# Altium PCB 產學1v2.PcbDoc
Units mm, origin at the board's own origin, x right, y up, seen from the top; angles counter-clockwise.
Board outline 142.11 x 95 mm, 2 copper layers (Top Layer, Bottom Layer); 73 components, 69 nets, 348 pads, 69 vias.
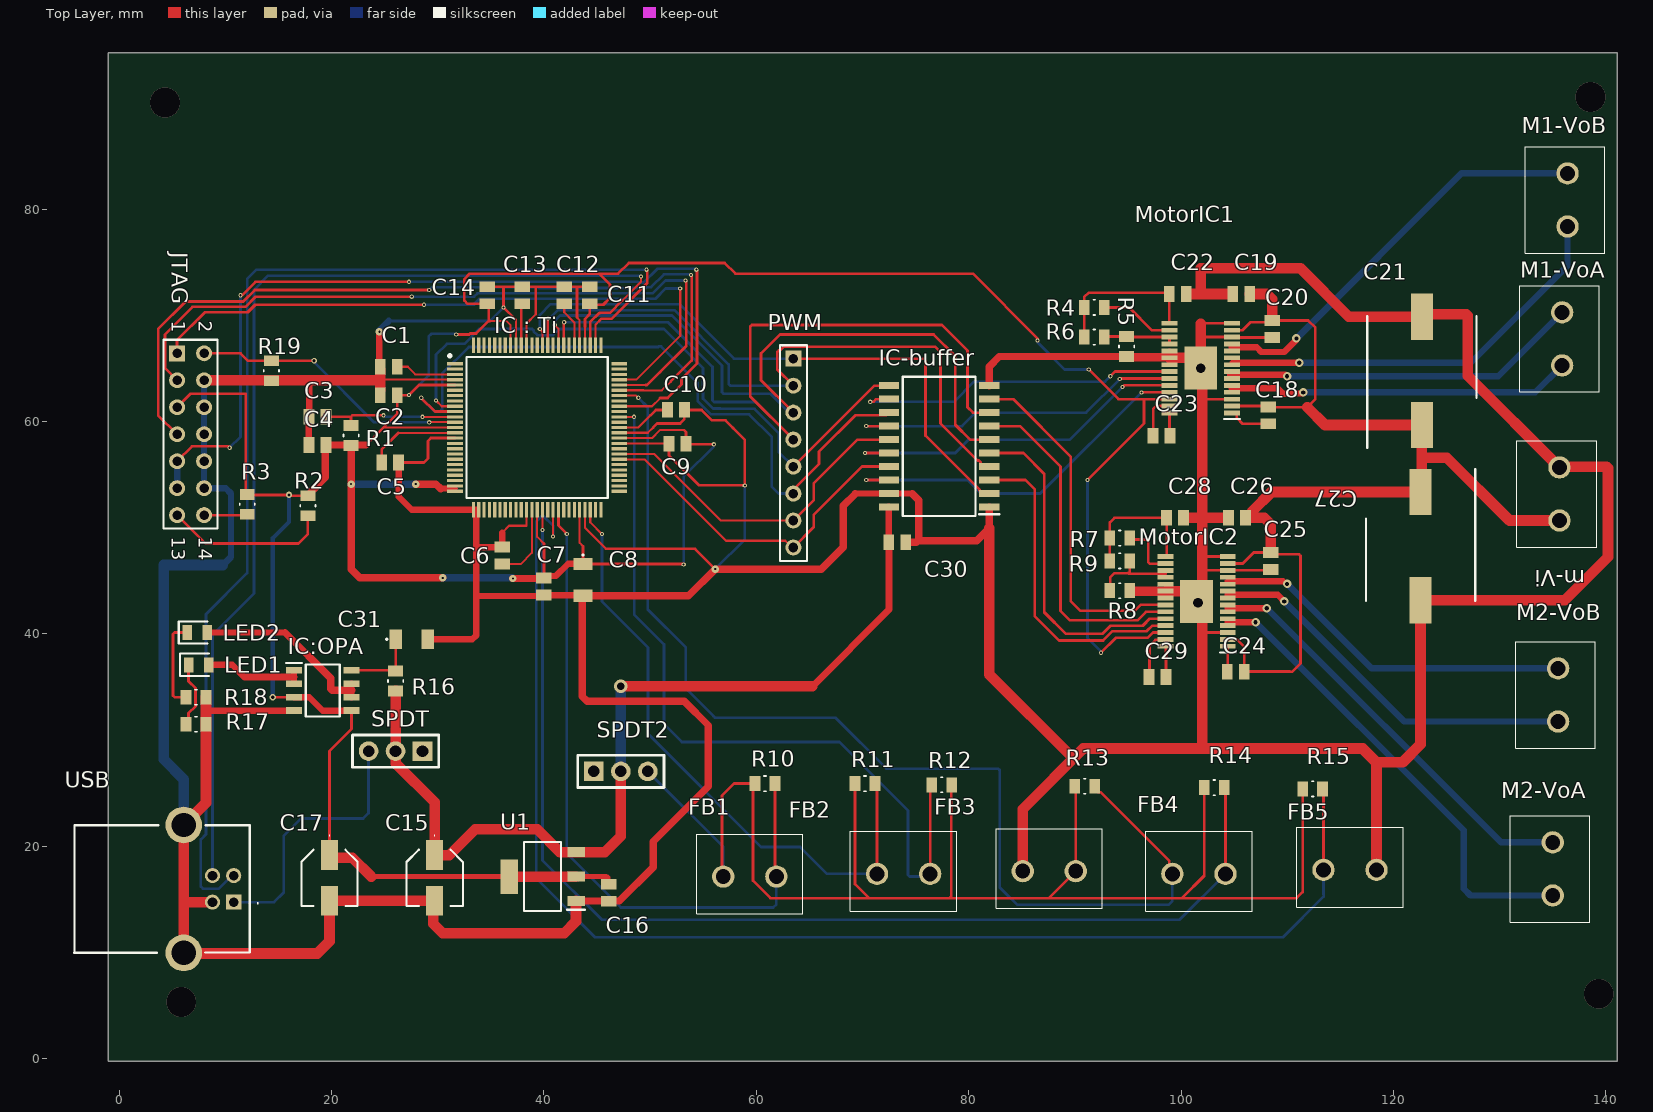
[diagram p0: Top Layer view]
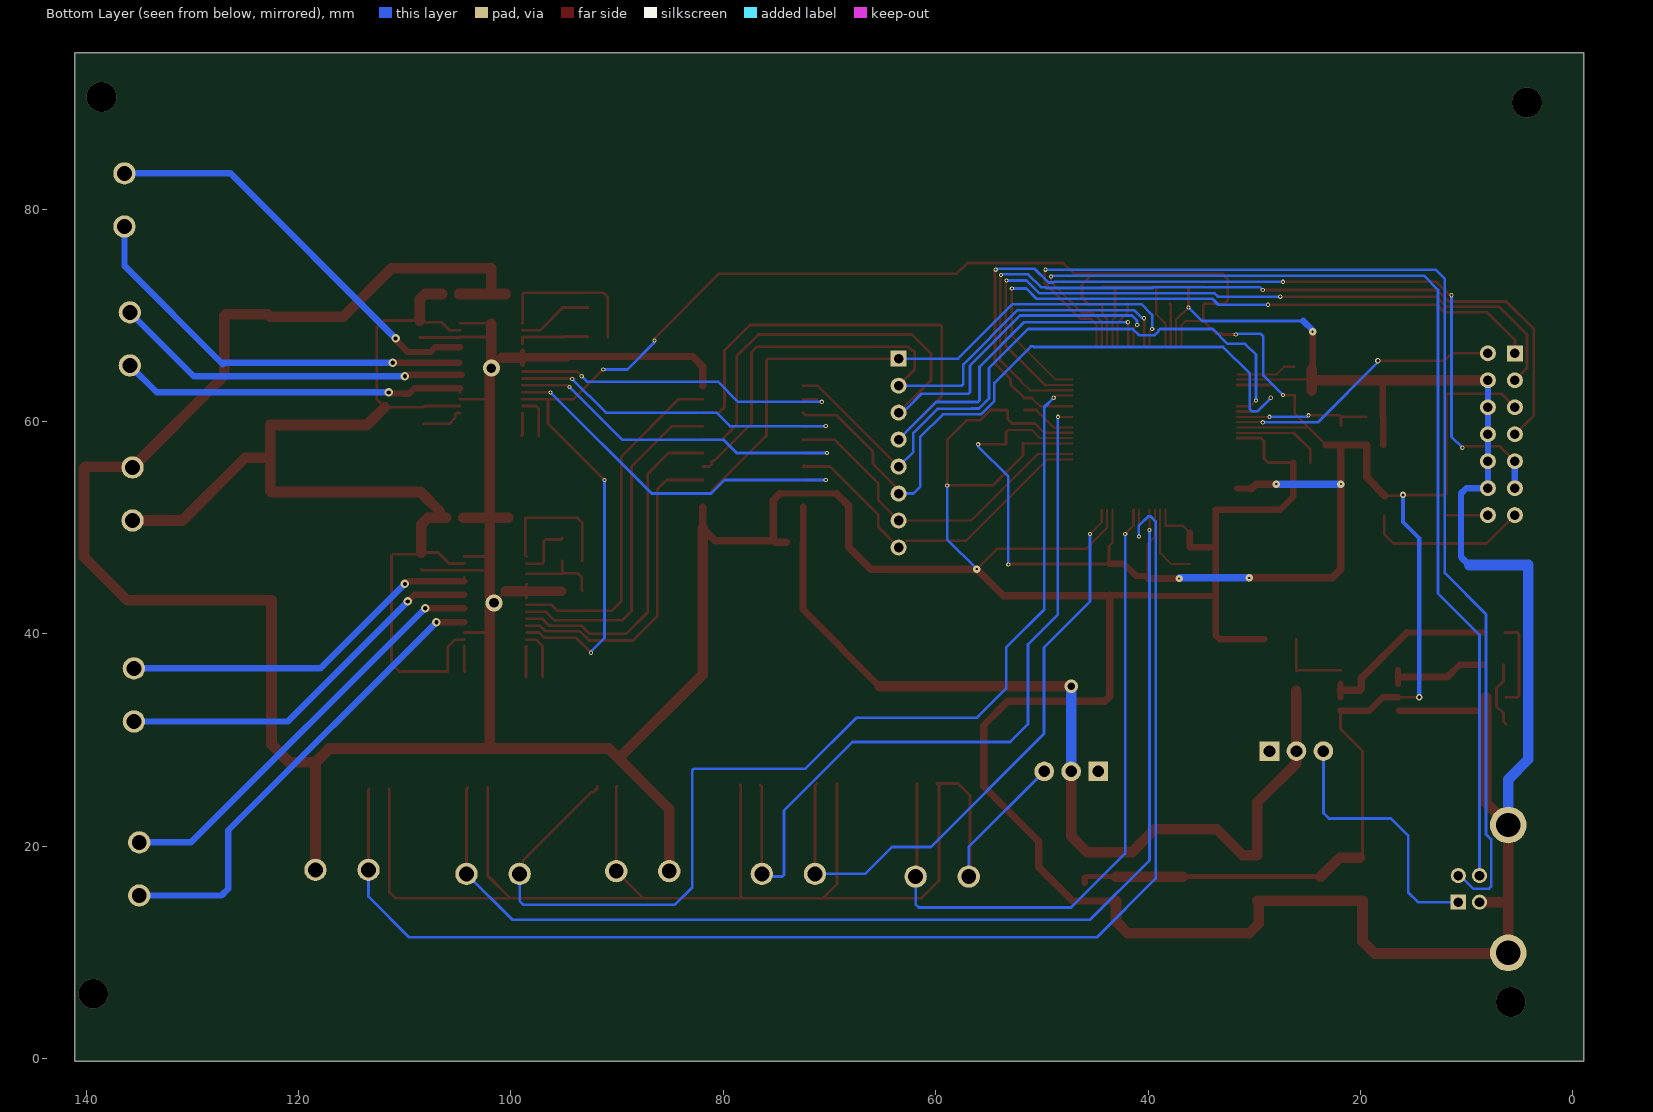
[diagram p1: Bottom Layer view, seen from below]
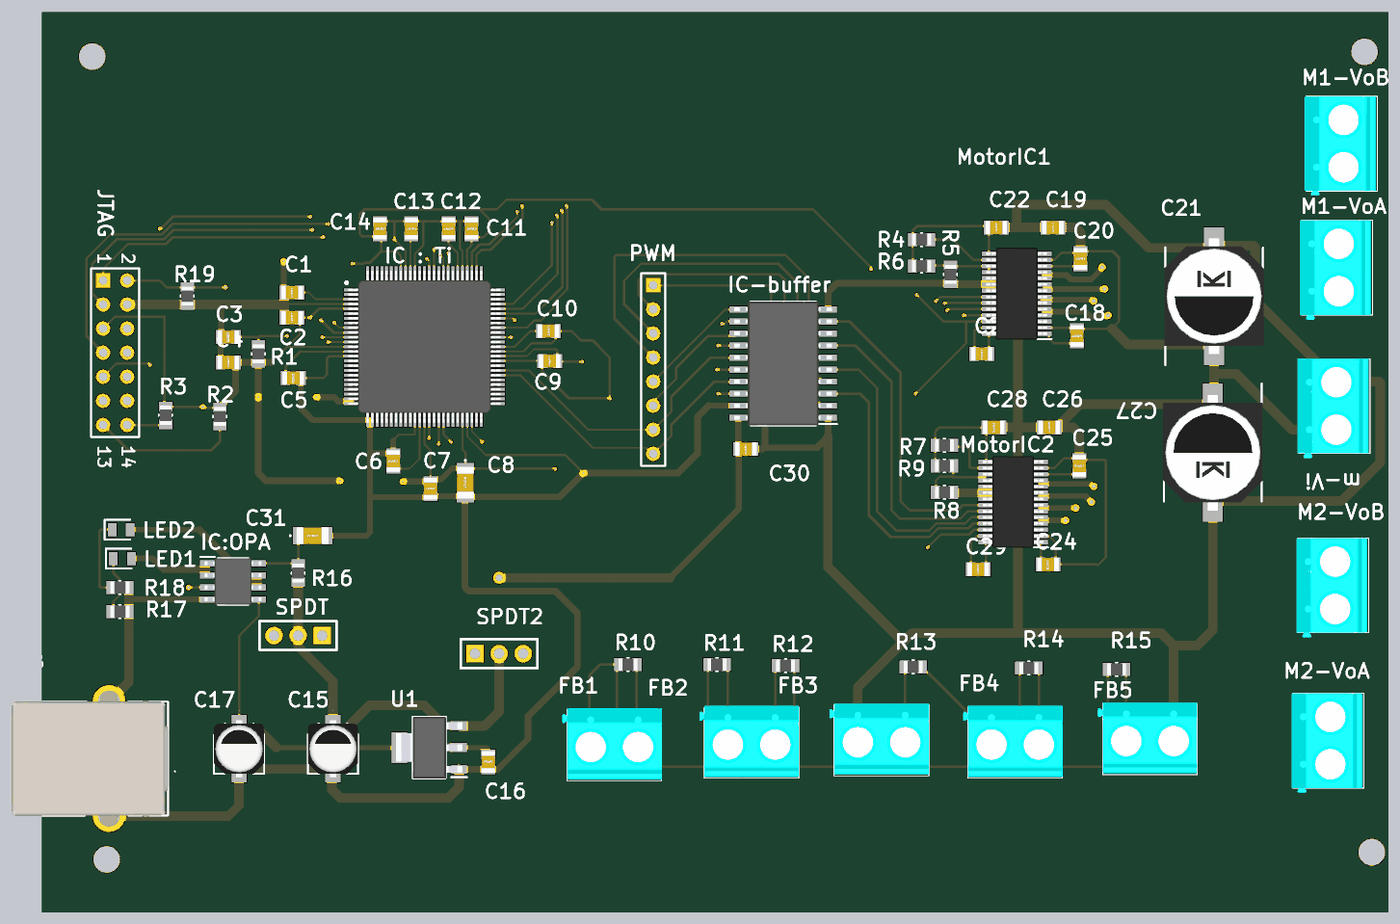
[diagram p2: 3D render of the assembled board from above, using the file's embedded part models]

## Layer stack, top to bottom
Top Solder: solder mask 0.0102, Solder Resist, Dk 3.5
Top Layer: signal copper 0.0356
Dielectric 1: dielectric 0.32, FR-4, Dk 4.8
Bottom Layer: signal copper 0.0356
Bottom Solder: solder mask 0.0102, Solder Resist, Dk 3.5

## Board outline
-1.016,-0.254 -1.016,94.742 141.097,94.742 141.097,-0.254 140.843,-0.254

## Design rules (kind name [scope] priority, off if disabled: settings)
Clearance [All] p1: gap=0.254 ignorepadtopadclearanceinfootprint=FALSE except(0: Arc-Hole Track-Hole SMDPad-Hole THPad-Hole Via-Hole Fill-Hole Poly-Hole Region-Hole Text-Hole)
PolygonConnect [All] p1: connectstyle=Relief reliefconductorwidth=0.254 reliefentries=4 polygonreliefangle="90 Angle" airgapwidth=0.254
RoutingVias [All] p1: holewidth=0.711 width=1.27 viastyle="Through Hole" minholewidth=0.711 minwidth=1.27 maxholewidth=0.711 maxwidth=1.27
SolderMaskExpansion [All] p1: expansion=0.102 istentingtop=FALSE
Width [All] p1: maxlimit=0.254 minlimit=0.254 preferedwidth=0.254
30 further rules are at their usual default settings.

## Components (designator, comment, footprint, x,y, rotation, side; value= is the part's Value field where it differs from the comment)
C1 "1.2uF" CAPC2012X140N 25.4,65.151 r0 top
C2 "2.2uF" CAPC2012X140N 25.4,62.484 r0 top
C3 "0.1uF" CAPC2012X140N 18.669,60.452 r0 top
C4 "2.2uF" CAPC2012X140N 18.669,57.785 r180 top
C5 "1.2uF" CAPC2012X140N 25.527,56.134 r0 top
C6 "1.2uF" CAPC2012X140N 36.068,47.371 r270 top
C7 "2.2uF" CAPC2012X140N 40.005,44.45 r270 top
C8 "1uF" C1206 43.688,45.085 r270 top
C9 "2.2uF" CAPC2012X140N 52.578,57.912 r180 top
C10 "1.2uF" CAPC2012X140N 52.451,61.087 r180 top
C11 "2.2uF" CAPC2012X140N 44.323,71.882 r90 top
C12 "1.2uF" CAPC2012X140N 41.91,71.882 r90 top
C13 "1.2uF" CAPC2012X140N 37.973,71.882 r90 top
C14 "2.2uF" CAPC2012X140N 34.671,71.882 r90 top
C15 "10uF" EEE0GA101SR 29.718,17.018 r270 top
C16 "470PF" CAPC2012X140N 46.101,15.621 r270 top
C17 "10uF" EEE0GA101SR 19.812,17.018 r270 top
C18 "220nF" CAPC2012X140N 108.204,60.579 r90 top
C19 "10nF" CAPC2012X140N 105.664,72.009 r180 top
C20 "10nF" CAPC2012X140N 108.585,68.707 r270 top
C21 "100uF" CAPAE1030X1050N 122.682,64.77 r90 top
C22 "470nF" CAPC2012X140N 99.695,72.009 r0 top
C23 "22nF" CAPC2012X140N 98.171,58.674 r0 top
C24 "220nF" CAPC2012X140N 105.156,36.449 r0 top
C25 "10nF" CAPC2012X140N 108.458,46.863 r270 top
C26 "10nF" CAPC2012X140N 105.283,50.927 r180 top
C27 "100uF" CAPAE1030X1050N 122.555,48.26 r270 top
C28 "470nF" CAPC2012X140N 99.441,50.927 r0 top
C29 "22nF" CAPC2012X140N 97.79,35.941 r0 top
C30 "1.2uf" CAPC2012X140N 73.279,48.641 r0 top
C31 "1uF" C1206 27.559,39.497 r0 top
FB1 "KF301-2P" KF3012P 56.896,17.145 r0 top
FB2 "KF301-2P" KF3012P 71.374,17.399 r0 top
FB3 "KF301-2P" KF3012P 85.09,17.653 r0 top
FB4 "KF301-2P" KF3012P 99.187,17.399 r0 top
FB5 "KF301-2P" KF3012P 113.411,17.78 r0 top
"IC : Ti" "TMS320F28069FPZT" QFP50P1600X1600X160-100N 39.37,59.436 r0 top
IC-buffer "74HC244D" SOIC127P1030X250-20N 77.216,57.658 r180 top
IC:OPA "LM358DR" SOIC127P600X175-8N 19.177,34.671 r0 top
JTAG "Header 7X2" HDR2X7 5.461,66.421 r270 top
LED1 "150080AS75000" LEDC2012X80N 7.493,37.084 r0 top
LED2 "150080AS75000" LEDC2012X80N 7.366,40.132 r0 top
M1-VoA "KF301-2P" KF3012P 135.89,65.278 r90 top
M1-VoB "KF301-2P" KF3012P 136.398,78.359 r90 top
M2-VoA "KF301-2P" KF3012P 135.001,15.367 r90 top
M2-VoB "KF301-2P" KF3012P 135.509,31.75 r90 top
m-Vi "KF301-2P" KF3012P 135.636,50.673 r90 top
MotorIC1 "DRV8424PPWPR" SOP65P640X120-29N 101.854,65.024 r180 top
MotorIC2 "DRV8424PPWPR" SOP65P640X120-29N 101.473,43.053 r180 top
PWM "Header 8" HDR1X8 63.5,65.913 r270 top
R1 "1K" RESC2013X65N 21.844,58.674 r270 top
R2 "4.7K" RESC2013X65N 17.78,52.07 r270 top
R3 "4.7K" RESC2013X65N 12.065,52.197 r270 top
R4 "4.7K" RESC2013X65N 91.821,70.739 r180 top
R5 "5K" RESC2013X65N 94.869,67.056 r90 top
R6 "5K" RESC2013X65N 91.821,67.945 r180 top
R7 "4.7K" RESC2013X65N 94.234,49.022 r180 top
R8 "5K" RESC2013X65N 94.234,44.069 r180 top
R9 "5K" RESC2013X65N 94.234,46.863 r180 top
R10 "2.7K" RESC2013X65N 60.833,25.908 r0 top
R11 "2.7K" RESC2013X65N 70.231,25.908 r0 top
R12 "2.7K" RESC2013X65N 77.47,25.781 r180 top
R13 "2.7K" RESC2013X65N 90.932,25.654 r0 top
R14 "2.7K" RESC2013X65N 103.124,25.527 r0 top
R15 "2.7K" RESC2013X65N 112.395,25.4 r0 top
R16 "1.5K" RESC2013X65N 26.035,35.56 r90 top
R17 "1.5K" RESC2013X65N 7.239,31.496 r0 top
R18 "1.5K" RESC2013X65N 7.239,34.036 r0 top
R19 "4.7K" RESC2013X65N 14.351,64.77 r90 top
SPDT "SW1" PCBComponent_1 28.575,28.956 r90 top
SPDT2 "SW2" PCBComponent_1 44.704,27.051 r270 top
U1 "LD1117AS33TR" SOT230P700X190-4N 39.878,17.145 r180 top
USB "61400416121" 61400416121 10.795,14.732 r270 top

## Footprints (in the part's own frame and the unit in brackets; to place one, negate y for a bottom-side part, rotate by r counter-clockwise, add the part's x,y. Pads: shape width x height; smd on the part's side, far side on the other; paste and mask are expansions set on the pad)
61400416121 [mm]
  rect 1.42x1.42 hole 0.92: 1(0,0)
  round 1.42 hole 0.92: 2(-2.5,0) 3(-2.5,-2) 4(0,-2)
  round 3.45 hole 2.3: MH1(4.77,-4.71) MH2(-7.27,-4.71)
  silkscreen extent -7.25,-14.99 4.75,2.3, body extent -8.72,-14.99 6.22,1.51, height 10.65
C1206 [mm]
  rect 1.15x1.8 smd: 1(-1.5,0) 2(1.5,0)
  silkscreen extent -2.4,-0.05 -2.3,0.05, body extent -1.7,-0.9 1.7,0.9, height 1.75
CAPAE1030X1050N [mm]
  rect 4.35x2.1 smd: 1(-5.1,0) 2(5.1,0)
  silkscreen extent -7.27,-5.15 5.15,5.15, body extent -6.1,-5.25 6.1,5.25, height 10.51
CAPC2012X140N [mm]
  rect 1.02x1.47 smd: 1(-0.8,0) 2(0.8,0)
  body extent -1.15,-0.73 1.15,0.72, height 1.4
EEE0GA101SR [mm]
  rect 2.8x1.6 smd: 1(-2.15,0) 2(2.15,0)
  silkscreen extent -4.03,-2.65 2.65,2.65, body extent 0,0 0,0
HDR1X8 [mm] "Connector; Header; 8 Position"
  rect 1.5x1.5 hole 0.9: 1(0,0)
  round 1.5 hole 0.9: 2(2.54,0) 3(5.08,0) 4(7.62,0) 5(10.16,0) 6(12.7,0) 7(15.24,0) 8(17.78,0)
  silkscreen extent -1.27,-1.27 19.05,1.27
HDR2X7 [mm] "Connector; Header; 7x2 Position"
  rect 1.5x1.5 hole 0.9: 1(0,0)
  round 1.5 hole 0.9: 2(0,2.54) 3(2.54,0) 4(2.54,2.54) 5(5.08,0) 6(5.08,2.54) 7(7.62,0) 8(7.62,2.54) 9(10.16,0) 10(10.16,2.54) 11(12.7,0) 12(12.7,2.54) 13(15.24,0) 14(15.24,2.54)
  silkscreen extent -1.27,-1.27 16.51,3.81
KF3012P [mm]
  round 2.1 hole 1.4: 1(0,0) 2(5,0)
  silkscreen extent -2.5,-3.5 7.5,4, body extent -2.99,-3.35 7.51,4.15, height 10
LEDC2012X80N [mm]
  rect 0.9x1.4 smd: 1(-0.95,0) 2(0.95,0)
  silkscreen extent -1.75,-1.05 0.95,1.05
PCBComponent_1 [mm]
  rect 1.85x1.85 hole 1.1: 1(0,0)
  round 1.85 hole 1.1: 2(0,2.54) 3(0,5.08)
  silkscreen extent -1.52,-1.52 1.52,6.6
QFP50P1600X1600X160-100N [mm]
  rect 1.475x0.3 smd: 1(-7.738,6) 2(-7.738,5.5) 3(-7.738,5) 4(-7.738,4.5) 5(-7.738,4) 6(-7.738,3.5) 7(-7.738,3) 8(-7.738,2.5) 9(-7.738,2) 10(-7.738,1.5) 11(-7.738,1) 12(-7.738,0.5) 13(-7.738,0) 14(-7.738,-0.5) 15(-7.738,-1) 16(-7.738,-1.5) 17(-7.738,-2) 18(-7.738,-2.5) 19(-7.738,-3) 20(-7.738,-3.5) 21(-7.738,-4) 22(-7.738,-4.5) 23(-7.738,-5) 24(-7.738,-5.5) 25(-7.738,-6) 51(7.738,-6) 52(7.738,-5.5) 53(7.738,-5) 54(7.738,-4.5) 55(7.738,-4) 56(7.738,-3.5) 57(7.738,-3) 58(7.738,-2.5) 59(7.738,-2) 60(7.738,-1.5) 61(7.738,-1) 62(7.738,-0.5) 63(7.738,0) 64(7.738,0.5) 65(7.738,1) 66(7.738,1.5) 67(7.738,2) 68(7.738,2.5) 69(7.738,3) 70(7.738,3.5) 71(7.738,4) 72(7.738,4.5) 73(7.738,5) 74(7.738,5.5) 75(7.738,6)
  rect 0.3x1.475 smd: 26(-6,-7.738) 27(-5.5,-7.738) 28(-5,-7.738) 29(-4.5,-7.738) 30(-4,-7.738) 31(-3.5,-7.738) 32(-3,-7.738) 33(-2.5,-7.738) 34(-2,-7.738) 35(-1.5,-7.738) 36(-1,-7.738) 37(-0.5,-7.738) 38(0,-7.738) 39(0.5,-7.738) 40(1,-7.738) 41(1.5,-7.738) 42(2,-7.738) 43(2.5,-7.738) 44(3,-7.738) 45(3.5,-7.738) 46(4,-7.738) 47(4.5,-7.738) 48(5,-7.738) 49(5.5,-7.738) 50(6,-7.738) 76(6,7.738) 77(5.5,7.738) 78(5,7.738) 79(4.5,7.738) 80(4,7.738) 81(3.5,7.738) 82(3,7.738) 83(2.5,7.738) 84(2,7.738) 85(1.5,7.738) 86(1,7.738) 87(0.5,7.738) 88(0,7.738) 89(-0.5,7.738) 90(-1,7.738) 91(-1.5,7.738) 92(-2,7.738) 93(-2.5,7.738) 94(-3,7.738) 95(-3.5,7.738) 96(-4,7.738) 97(-4.5,7.738) 98(-5,7.738) 99(-5.5,7.738) 100(-6,7.738)
  silkscreen extent -8.35,-6.65 6.65,6.87, body extent -8.01,-8.01 8.01,8.01, height 1.5
RESC2013X65N [mil]
  rect 40x55 smd: 1(-37,0) 2(37,0)
  silkscreen extent -4,-28 4,28, body extent -39,-25 39,24, height 24
SOIC127P600X175-8N [mm]
  rect 1.525x0.65 smd: 1(-2.712,1.905) 2(-2.712,0.635) 3(-2.712,-0.635) 4(-2.712,-1.905) 5(2.712,-1.905) 6(2.712,-0.635) 7(2.712,0.635) 8(2.712,1.905)
  silkscreen extent -3.47,-2.45 1.6,2.58, body extent -3,-2.45 3,2.45, height 1.75
SOIC127P1030X250-20N [mm]
  rect 1.9x0.65 smd: 1(-4.725,5.715) 2(-4.725,4.445) 3(-4.725,3.175) 4(-4.725,1.905) 5(-4.725,0.635) 6(-4.725,-0.635) 7(-4.725,-1.905) 8(-4.725,-3.175) 9(-4.725,-4.445) 10(-4.725,-5.715) 11(4.725,-5.715) 12(4.725,-4.445) 13(4.725,-3.175) 14(4.725,-1.905) 15(4.725,-0.635) 16(4.725,0.635) 17(4.725,1.905) 18(4.725,3.175) 19(4.725,4.445) 20(4.725,5.715)
  silkscreen extent -5.68,-6.55 3.42,6.55, body extent -5.15,-6.55 5.15,6.55, height 2.5
SOP65P640X120-29N [mm]
  rect 1.475x0.45 smd: 1(-2.938,4.225) 2(-2.938,3.575) 3(-2.938,2.925) 4(-2.938,2.275) 5(-2.938,1.625) 6(-2.938,0.975) 7(-2.938,0.325) 8(-2.938,-0.325) 9(-2.938,-0.975) 10(-2.938,-1.625) 11(-2.938,-2.275) 12(-2.938,-2.925) 13(-2.938,-3.575) 14(-2.938,-4.225) 15(2.938,-4.225) 16(2.938,-3.575) 17(2.938,-2.925) 18(2.938,-2.275) 19(2.938,-1.625) 20(2.938,-0.975) 21(2.938,-0.325) 22(2.938,0.325) 23(2.938,0.975) 24(2.938,1.625) 25(2.938,2.275) 26(2.938,2.925) 27(2.938,3.575) 28(2.938,4.225)
  rect 3.1x4.05 smd: 29(0,0)
  silkscreen extent -3.67,4.8 -2.2,4.8, body extent -3.2,-4.85 3.2,4.85, height 1.13
SOT230P700X190-4N [mm]
  rect 1.65x0.95 smd: 1(-3.15,2.3) 2(-3.15,0) 3(-3.15,-2.3)
  rect 1.65x3.25 smd: 4(3.15,0)
  silkscreen extent -3.98,-3.25 1.75,3.25, body extent -3.5,-3.25 3.5,3.25, height 1.9

## Part data
C1 C2 C3 C4 C5 C6 C7 C9 C10 C11 C12 C13 C14 C16 C18 C19 C20 C22 C23 C24 C25 C26 C28 C29 C30: library part C0805C225K4RAC3123, "Capacitor", Manufacturer_Name=KEMET, Mouser Part Number=80-C0805C225K4R3123, Arrow Part Number=C0805C225K4RAC3123, Arrow Price/Stock=https://www.arrow.com/en/products/c0805c225k4rac3123/kemet-corporation, Datasheet Link=https://componentsearchengine.com/Datasheets/1/C0805C225K4RAC3123.pdf, Height=1.4mm, Manufacturer_Part_Number=C0805C225K4RAC3123, Mouser Price/Stock=https://www.mouser.co.uk/ProductDetail/KEMET/C0805C225K4RAC3123?qs=TJyCevD4CUGNcz2FRWNwVg%3D%3D
C8 C31: library part C1206C105K6RACTU, "Capacitor", Manufacturer_Name=KEMET, Mouser Part Number=80-C1206C105K6RACTU, Datasheet Link=https://content.kemet.com/datasheets/KEM_C1002_X7R_SMD.pdf, Manufacturer_Part_Number=C1206C105K6RACTU, Mouser Price/Stock=https://www.mouser.co.uk/ProductDetail/KEMET/C1206C105K6RACTU?qs=gt1LBUVyoHnikkKVmJ7iSQ%3D%3D
C15 C17: library part EEE-FC1V100AR, "Capacitor Polarised", Manufacturer_Name=Panasonic, Mouser Part Number=667-EEE-FC1V100AR, Arrow Part Number=EEE-FC1V100AR, Arrow Price/Stock=http://www.arrow.com/en/products/eee-fc1v100ar/panasonic, Datasheet Link=http://industrial.panasonic.com/cdbs/www-data/pdf/RDE0000/ABA0000C1169.pdf, Height=6.5mm, Manufacturer_Part_Number=EEE-FC1V100AR, Mouser Price/Stock=https://www.mouser.co.uk/ProductDetail/Panasonic/EEE-FC1V100AR/?qs=d1CqaRUMZD9GQhdQwE2xcQ%3D%3D
C21 C27: library part EDT107M050S9PAA, "Capacitor", Manufacturer_Name=KEMET, Mouser Part Number=80-EDT107M050S9PAA, Arrow Part Number=EDT107M050S9PAA, Arrow Price/Stock=https://www.arrow.com/en/products/edt107m050s9paa/kemet-corporation?region=nac, Datasheet Link=https://ms.componentsearchengine.com/Datasheets/2/EDT107M050S9PAA.pdf, Height=10.5mm, Manufacturer_Part_Number=EDT107M050S9PAA, Mouser Price/Stock=https://www.mouser.co.uk/ProductDetail/KEMET/EDT107M050S9PAA?qs=E9QF1UCAUX4foN0Q8i5wVQ%3D%3D
FB1 FB2 FB3 FB4 FB5 M1-VoA M1-VoB M2-VoA M2-VoB m-Vi: "Connector", Manufacturer_Name="Handson Technology", Datasheet Link=http://www.handsontec.com/dataspecs/terminal%20block-5mm.pdf, Height=10mm, Manufacturer_Part_Number=KF301-2P
"IC : Ti": "Integrated Circuit", Manufacturer_Name="Texas Instruments", Mouser Part Number=595-TMS320F28069FPZT, Arrow Part Number=TMS320F28069FPZT, Arrow Price/Stock=https://www.arrow.com/en/products/tms320f28069fpzt/texas-instruments, Datasheet Link=http://www.ti.com/lit/gpn/tms320f28069f, Height=1.6mm, Manufacturer_Part_Number=TMS320F28069FPZT, Mouser Price/Stock=https://www.mouser.co.uk/ProductDetail/Texas-Instruments/TMS320F28069FPZT?qs=VMlqFFbv3sSkglMISrjiog%3D%3D
IC-buffer: "Integrated Circuit", Manufacturer_Name=Toshiba, Mouser Part Number=757-74HC244D, Arrow Part Number=74HC244D, Arrow Price/Stock=https://www.arrow.com/en/products/74hc244d/toshiba?region=nac, Datasheet Link=https://www.arrow.com/en/products/74hc244d/toshiba, Height=2.5mm, Manufacturer_Part_Number=74HC244D, Mouser Price/Stock=https://www.mouser.co.uk/ProductDetail/Toshiba/74HC244D?qs=7EBvPakHacWwVm6mPM9mPg%3D%3D
IC:OPA: "Integrated Circuit", Manufacturer_Name="Texas Instruments", Mouser Part Number=595-LM358DR, Arrow Part Number=LM358DR, Arrow Price/Stock=https://www.arrow.com/en/products/lm358dr/texas-instruments?region=nac, Datasheet Link=https://www.ti.com/lit/ds/symlink/lm358.pdf?ts=1593170624750&ref_url=https%253A%252F%252Fwww.ti.com%252Fstore%252Fti%252Fen%252Fp%252Fproduct%252F%253Fp%253DLM358DR%2526keyMatch%253DLM358DR%2526tisearch%253DSearch-EN-everything%2526usecase%253DOPN, Height=1.75mm, Manufacturer_Part_Number=LM358DR, Mouser Price/Stock=https://www.mouser.co.uk/ProductDetail/Texas-Instruments/LM358DR?qs=Zu35EjizYSSY6pJ37yjmHA%3D%3D
JTAG: "Header, 7-Pin, Dual row", LatestRevisionDate=17-Jul-2002, LatestRevisionNote="Re-released for DXP Platform.", Publisher="Altium Limited"
LED1 LED2: "LED", Manufacturer_Name="Wurth Elektronik", Mouser Part Number=710-150080AS75000, Datasheet Link=https://componentsearchengine.com/Datasheets/2/150080AS75000.pdf, Height=0.8mm, Manufacturer_Part_Number=150080AS75000, Mouser Price/Stock=https://www.mouser.co.uk/ProductDetail/Wurth-Elektronik/150080AS75000?qs=sPbYRqrBIVkeO9bp3fBTig%3D%3D
MotorIC1 MotorIC2: "Integrated Circuit", Manufacturer_Name="Texas Instruments", Mouser Part Number=595-DRV8424PPWPR, Arrow Part Number=DRV8424PPWPR, Arrow Price/Stock=https://www.arrow.com/en/products/drv8424ppwpr/texas-instruments?region=nac, Datasheet Link=https://www.ti.com/lit/ds/symlink/drv8424e.pdf?ts=1621759599316&ref_url=https%253A%252F%252Fwww.mouser.de%252F, Height=1.2mm, Manufacturer_Part_Number=DRV8424PPWPR, Mouser Price/Stock=https://www.mouser.co.uk/ProductDetail/Texas-Instruments/DRV8424PPWPR?qs=CiayqK2gdcKHVqboqYVmRA%3D%3D
PWM: "Header, 8-Pin", LatestRevisionDate=17-Jul-2002, LatestRevisionNote="Re-released for DXP Platform.", Publisher="Altium Limited"
R1 R2 R3 R4 R5 R6 R7 R8 R9 R10 R11 R12 R13 R14 R15 R16 R17 R18 R19: library part ERJ-6GEYJ102V, "Resistor", Manufacturer_Name=Panasonic, Mouser Part Number=667-ERJ-6GEYJ102V, Arrow Part Number=ERJ-6GEYJ102V, Arrow Price/Stock=https://www.arrow.com/en/products/erj-6geyj102v/panasonic?region=europe, Manufacturer_Part_Number=ERJ-6GEYJ102V, Mouser Price/Stock=https://www.mouser.co.uk/ProductDetail/Panasonic/ERJ-6GEYJ102V?qs=tQNqqtTOejLZQ8YYVXgJXw%3D%3D
SPDT SPDT2: library part Component_1
U1: "Power Supply", Manufacturer_Name=STMicroelectronics, Mouser Part Number=511-LD1117AS33, Arrow Part Number=LD1117AS33TR, Arrow Price/Stock=https://www.arrow.com/en/products/ld1117as33tr/stmicroelectronics?region=nac, Datasheet Link=https://4donline.ihs.com/images/VipMasterIC/IC/SGST/SGSTS49356/SGSTS49356-1.pdf?hkey=6D3A4C79FDBF58556ACFDE234799DDF0, Height=1.9mm, Manufacturer_Part_Number=LD1117AS33TR, Mouser Price/Stock=https://www.mouser.co.uk/ProductDetail/STMicroelectronics/LD1117AS33TR?qs=C3bf%2FVrkE5CoDDd7wyn%252BaQ%3D%3D
USB: "Connector", Manufacturer_Name="Wurth Elektronik", Mouser Part Number=710-61400416121, Datasheet Link=https://www.we-online.com/catalog/datasheet/61400416121.pdf, Height=11.25mm, Manufacturer_Part_Number=61400416121, Mouser Price/Stock=https://www.mouser.co.uk/ProductDetail/Wurth-Elektronik/61400416121?qs=rS3zZhy2AQOfJvFesH7XZA%3D%3D

## Via types
v1: diameter 0.4, hole 0.2, Top Layer to Bottom Layer, 45 vias
v2: diameter 0.8, hole 0.4, Top Layer to Bottom Layer, 8 vias
v3: diameter 0.7, hole 0.2, Top Layer to Bottom Layer, 6 vias
v4: diameter 2.79, hole 2.79, Top Layer to Bottom Layer, 4 vias
v5: diameter 1.6, hole 0.9, Top Layer to Bottom Layer, 2 vias
v6: diameter 0.6, hole 0.3, Top Layer to Bottom Layer, 2 vias
v7: diameter 1.27, hole 0.711, Top Layer to Bottom Layer, 1 vias
v8: diameter 0.513, hole 0.308, Top Layer to Bottom Layer, 1 vias

## Nets (pads, with @x,y where several pads share a name; then routed paths per layer and width w, separated by ;. In a path a pad name is that pad's centre, name@x,y a point inside that pad or via, vN(x,y) a via of type N, cw(c..) or ccw(c..) an arc to the next point about the centre after c; other vN are vias at no path point)
+3.3V: "IC : Ti.5" "IC : Ti.13" "IC : Ti.24" "IC : Ti.25" "IC : Ti.38" "IC : Ti.46" "IC : Ti.61" "IC : Ti.79" "IC : Ti.93" C2.2 C4.1 C7.1 C8.1 C9.1 C11.1 C14.1 C16.1 C17.1 IC:OPA.3 IC:OPA.5 JTAG.5 MotorIC1.26 MotorIC2.26 R1.2 R2.1 R3.1 U1.2 U1.4 | length 346.3
  Top Layer w0.2: 24.892,59.436 31.632,59.436 ; 34.925,69.469 36.449,69.469 36.87,69.048 36.87,67.174 ; 39.37,51.698 39.37,49.149 40.005,48.514 ; 43.37,51.698 43.37,48.578 43.688,48.26 ; 43.87,67.174 43.87,68.889 ; 47.108,58.436 50.181,58.436 50.927,59.182 53.213,59.182
  Top Layer w0.254: JTAG.5 6.731,62.611 11.938,62.611 R3.1@11.938,53.137 ; R3.1 12.116,53.086 v6(16.002,53.086) 16.096,53.086 16.172,53.01 17.704,53.01 R2.1 ; v6(14.478,34.036) IC:OPA.3 ; C4.1@19.431,57.747 C4.1 ; C17.1@20.057,18.923 C17.1 19.812,28.956 21.889,31.033 IC:OPA.5 ; 23.241,57.785 24.892,59.436 26.2,60.744 C2.2 v1(27.305,62.484) 28.257,63.436 31.632,63.436 ; v1(31.75,68.199) 32.969,68.199 33.062,68.293 33.622,68.293 34.798,69.469 34.798,70.955 C14.1 32.804,71.082 32.512,71.374 32.512,73.406 33.02,73.914 45.212,73.914 ; 34.798,69.596 34.925,69.469 ; C7.1 40.005,48.514 ; 42.291,46.609 42.418,46.609 ; C8.1@43.664,46.609 43.688,46.633 43.688,48.26 ; C8.1 53.11,46.585 v1(53.162,46.534) ; 43.87,68.889 43.87,69.651 44.323,70.104 C11.1 44.412,70.993 45.593,70.993 46.228,71.628 46.228,72.898 45.212,73.914 ; 45.847,17.145 45.974,17.018 ; C16.1@45.974,16.548 C16.1 ; 53.213,59.182 53.378,59.017 C9.1 53.442,57.848 v1(56.007,57.848) ; v1(86.487,67.627) 86.487,67.818 80.391,73.914 58.039,73.914 57.023,74.93 48.006,74.93 46.99,73.914 45.212,73.914 ; v1(91.186,54.483) 96.514,59.811 96.514,62.099 ; v1(91.313,64.897) 94.111,62.099 96.514,62.099 ; v1(92.456,38.227) 93.853,39.624 96.857,39.624 97.361,40.128 MotorIC2.26 ; MotorIC1.26 96.514,62.099
  Top Layer w0.5: 23.749,17.145 U1.4 ; U1.2 45.847,17.145
  Top Layer w0.6: IC:OPA.3 17.907,34.036 19.177,32.766 IC:OPA.5 ; 30.292,53.686 31.632,53.686 ; C7.1 40.2,45.445 41.127,45.445 42.291,46.609 ; 42.418,46.609 C8.1@43.664,46.609 ; C16.1@45.974,16.548 45.974,17.018
  Top Layer w0.7: R2.1@17.704,53.01 19.431,54.737 C4.1@19.431,57.747 ; C4.1 23.241,57.785 ; R1.2 v3(21.844,54.102) 21.844,46.101 22.671,45.274 v3(30.48,45.274) ; v3(27.94,54.102) 29.845,54.102 30.277,53.67 30.292,53.686 ; v3(37.084,45.212) 39.967,45.212 C7.1
  Top Layer w1: C17.1@20.057,18.923 21.971,18.923 23.749,17.145 ; U1.4 U1.2
  Bottom Layer w0.254: v1(27.305,62.484) 29.146,64.325 29.146,68.008 29.4,68.263 31.686,68.263 v1(31.75,68.199) ; v3@37.022,45.274 v3(37.084,45.212) ; v1(53.162,46.534) 53.162,54.813 56.007,57.658 v1(56.007,57.848) ; v1(86.487,67.627) 86.487,67.543 86.507,67.523 86.507,67.417 89.027,64.897 v1(91.313,64.897) ; v1(91.186,54.483) 91.186,39.624 92.456,38.354 v1(92.456,38.227)
  Bottom Layer w0.4: v6(14.478,34.036) 14.478,49.022 16.002,50.546 v6(16.002,53.086)
  Bottom Layer w0.7: v3(21.844,54.102) v3(27.94,54.102) ; v3(30.48,45.274) v3@37.022,45.274
+5V: C15.1 C30.1 IC-buffer.20 R16.1 SPDT2.2 SPDT.2 U1.3 | length 89.1
  Top Layer w0.254: SPDT.2 SPDT.2@26.049,28.942 ; U1.3 U1.3@43.042,19.431 ; C30.1 C30.1@72.517,48.603 ; IC-buffer.20@72.479,51.931 IC-buffer.20
  Top Layer w0.65: 65.278,35.052 72.517,42.291 C30.1@72.517,48.603 ; C30.1 IC-buffer.20@72.479,51.931
  Top Layer w1: SPDT.2 R16.1 ; SPDT.2@26.049,28.942 26.049,27.799 29.718,24.13 C15.1 31.106,19.168 33.528,21.59 39.37,21.59 41.515,19.445 U1.3 ; U1.3@43.042,19.431 45.72,19.431 47.244,20.955 SPDT2.2 ; v7(47.244,35.052) 65.278,35.052
  Bottom Layer w0.254: v7@47.244,34.798 47.266,34.82 47.266,35.03 v7(47.244,35.052)
  Bottom Layer w1: SPDT2.2 v7@47.244,34.798
GND: "IC : Ti.4" "IC : Ti.15" "IC : Ti.26" "IC : Ti.27" "IC : Ti.36" "IC : Ti.47" "IC : Ti.60" "IC : Ti.62" "IC : Ti.80" "IC : Ti.90" "IC : Ti.92" C1.1 C2.1 C3.1 C4.2 C5.2 C6.1 C7.2 C8.2 C9.2 C10.1 C11.2 C12.2 C13.2 C14.2 C15.2 C16.2 C17.2 C19.2 C20.2 C21.2 C22.2 C25.2 C26.2 C27.2 C28.2 C30.2 C31.2 FB3.1 FB5.2 IC-buffer.1 IC-buffer.10 IC-buffer.19 IC:OPA.4 JTAG.4 JTAG.6 JTAG.8 JTAG.10 JTAG.12 m-Vi.2 MotorIC1.3 MotorIC1.12 MotorIC1.14 MotorIC1.19 MotorIC1.20 MotorIC1.21 MotorIC1.29 MotorIC2.3 MotorIC2.12 MotorIC2.14 MotorIC2.19 MotorIC2.20 MotorIC2.21 MotorIC2.29 R5.1 R8.1 R17.2 R18.2 R19.1 U1.1 USB.4 USB.MH1 USB.MH2 | length 697.1
  Top Layer w0.2: 24.655,63.936 31.632,63.936 ; 36.068,49.53 36.719,50.181 38.37,50.181 38.37,51.698 ; v1(36.195,70.739) 37.37,69.564 37.37,67.174 ; 38.37,67.174 38.37,69.231 39.243,70.104 ; 43.116,69.787 43.37,69.533 43.37,67.174 ; 43.87,51.698 43.87,49.983 45.847,48.006 ; 47.108,57.936 C9.2@51.778,57.936 ; 47.108,58.936 49.792,58.936 50.292,59.436
  Top Layer w0.254: USB.MH1 USB.MH1@6.141,9.906 ; 6.085,14.605 6.212,14.732 ; R19.1 R19.1@14.402,63.881 ; C3.1 C3.1@17.907,60.49 ; C1.1@24.511,65.24 C1.1 ; C2.1 C2.1@24.6,62.709 ; 24.6,63.881 24.655,63.936 ; C5.2 28.702,56.134 29.083,56.515 29.083,58.166 29.353,58.436 31.632,58.436 ; C15.2@29.591,14.741 C15.2 ; 33.37,51.698 33.62,51.698 ; 33.62,48.133 33.658,48.171 ; C14.2 36.322,72.682 ; v1(36.195,70.739) 36.195,72.555 36.322,72.682 ; 39.243,70.104 39.243,72.682 ; C7.2@39.916,43.561 C7.2 ; 43.116,69.787 43.116,72.682 ; C8.2@43.623,43.65 C8.2 ; C11.2 43.116,72.682 ; 45.847,48.006 54.229,48.006 v3(56.134,46.101) ; 50.292,59.436 50.673,59.817 52.832,59.817 53.213,60.198 53.213,61.049 C10.1 54.864,61.087 55.848,60.103 57.118,60.103 57.817,59.404 57.817,59.371 58.928,58.259 v1@58.928,54.002 ; C9.2@51.778,57.936 C9.2 51.778,56.807 54.583,54.002 v1@58.928,54.002 ; v1(58.928,53.975) v1@58.928,54.002 ; 75.184,48.768 75.311,48.895 ; R8.1 R8.1@95.215,44.028 ; MotorIC2.21 MotorIC2.20 MotorIC2.19 ; MotorIC2.29@100.498,44.028 MotorIC2.29 v5(101.6,42.926) MotorIC2.29@101.981,42.545 ; MotorIC1.29@100.879,65.999 v5(101.854,65.024) MotorIC1.29@101.981,64.897 ; 101.854,67.945 101.858,67.949 MotorIC1.12 104.834,67.907 C20.2 ; 101.854,69.215 101.888,69.249 MotorIC1.14 ; 101.981,40.005 102.104,40.128 MotorIC2.3 ; 101.981,45.974 101.985,45.978 MotorIC2.12 108.373,45.978 C25.2 ; 101.981,47.244 102.108,47.244 102.142,47.278 MotorIC2.14 ; 101.981,62.103 101.985,62.099 MotorIC1.3 ; C21.2 C21.2@122.916,70.104 ; m-Vi.2 m-Vi.2@135.716,55.753 ; 140.059,55.753 140.208,55.604 ; 140.208,47.498 140.23,47.476 140.23,47.266 ; 36.322,72.682 C13.2 39.243,72.682 ; 39.243,72.682 C12.2 43.116,72.682
  Top Layer w0.45: MotorIC1.21 MotorIC1.20 MotorIC1.19
  Top Layer w0.6: 8.179,32.766 IC:OPA.4@16.338,32.766 ; R19.1@14.3,63.83 R19.1@14.3,63.881 ; C4.2 C3.1 ; C3.1@17.907,60.49 17.907,63.881 ; C1.1@24.511,65.24 v3(24.511,68.453) ; C5.2 26.327,52.921 27.55,51.698 33.37,51.698 ; C31.2 33.269,39.497 33.62,39.848 33.62,48.133 33.62,51.698 ; 33.655,43.561 C7.2@39.916,43.561 ; 33.658,48.171 C6.1 36.068,49.53 ; C7.2 C8.2@43.623,43.65 ; 69.342,53.213 IC-buffer.19 74.676,53.213
  Top Layer w0.7: U1.1 47.103,14.845 50.292,18.034 50.292,20.447 55.499,25.654 55.499,31.369 53.213,33.655 44.069,33.655 43.623,34.101 C8.2@43.623,43.65 ; C8.2 53.618,43.585 v3(56.134,46.101) 66.138,46.101 68.199,48.162 68.199,52.07 69.342,53.213 ; C30.2 75.057,48.641 75.184,48.768 80.772,48.768 81.941,49.937 IC-buffer.1 ; 74.676,53.213 75.311,52.578 75.311,48.895 ; IC-buffer.10 81.941,65.17 82.887,66.116 R5.1
  Top Layer w0.8: R5.1@94.701,66.04 MotorIC1.20@98.875,66.04
  Top Layer w0.9: R8.1@95.215,44.028 MotorIC2.20
  Top Layer w1: USB.MH1 6.085,14.605 USB.MH2 8.179,24.096 R17.2 8.179,32.766 R18.2 ; USB.MH1@6.141,9.906 18.669,9.906 19.812,11.049 C17.2 C15.2 ; 6.212,14.732 USB.4 ; JTAG.4 R19.1@14.3,63.881 ; R19.1@14.402,63.881 17.907,63.881 24.6,63.881 ; C2.1@24.6,62.963 24.6,63.881 ; C1.1@24.6,64.897 24.6,63.881 ; C15.2@29.591,14.741 29.591,12.7 30.48,11.811 41.91,11.811 43.028,12.929 U1.1 ; 81.941,49.937 81.941,36.169 89.789,28.321 ; FB3.1 85.09,23.495 90.805,29.21 101.981,29.21 ; MotorIC2.20 MotorIC2.29@100.498,44.028 ; MotorIC1.20@98.875,66.04 MotorIC1.20 MotorIC1.29@100.879,65.999 ; C28.2 101.981,50.927 ; C22.2 101.854,72.009 ; v5(101.854,65.024) 101.854,67.945 101.854,69.215 ; MotorIC2.29@101.981,42.545 101.981,40.005 101.981,29.21 ; MotorIC2.29@101.981,43.561 101.981,45.974 101.981,47.244 101.981,50.927 ; MotorIC1.29@101.981,64.897 101.981,62.103 101.981,50.927 ; C26.2 101.981,50.927 ; C19.2 101.854,72.009 ; FB5.2 118.411,27.893 ; C21.2 115.804,69.87 111.252,74.422 101.854,74.422 101.854,72.009 ; C21.2@122.916,70.104 126.851,70.104 127,69.955 127,64.309 m-Vi.2 ; m-Vi.2@135.716,55.753 140.059,55.753 ; 140.208,47.498 140.208,55.604 ; 140.23,47.266 136.124,43.16 C27.2 122.555,29.591 120.857,27.893 118.411,27.893 ; 101.981,29.21 117.094,29.21 118.411,27.893
  Bottom Layer w0.254: USB.MH2 USB.MH2@6.096,22.013 ; v3(24.511,68.453) v3@24.511,68.58 ; 25.4,69.469 34.925,69.469 v1(36.195,70.739) ; v3(56.134,46.101) 58.928,48.895 v1(58.928,53.975)
  Bottom Layer w0.6: JTAG.4 JTAG.6 JTAG.8 JTAG.10 JTAG.12 10.033,53.721 10.541,53.213 10.541,47.244 9.779,46.482 ; v3@24.511,68.58 25.4,69.469
  Bottom Layer w1: USB.MH2@6.096,22.013 6.096,26.289 4.191,28.194 4.191,46.482 9.779,46.482
NetC1_2: "IC : Ti.3" C1.2 | length 5.7
  Top Layer w0.2: C1.2 27.178,65.151 27.893,64.436 31.632,64.436
NetC3_2: "IC : Ti.11" C3.2 R1.1 | length 13.2
  Top Layer w0.2: v1(28.575,60.436) 31.632,60.436
  Top Layer w0.254: C3.2 21.695,60.452 ; R1.1 21.844,60.303 21.695,60.452 ; v1(24.892,60.579) 21.959,60.579 21.832,60.452 21.695,60.452
  Bottom Layer w0.254: v1(24.892,60.579) 24.932,60.579 25.075,60.436 v1(28.575,60.436)
NetC5_1: "IC : Ti.14" C5.1 | length 8.8
  Top Layer w0.2: 26.289,58.928 31.632,58.928
  Top Layer w0.254: C5.1 24.727,57.366 26.289,58.928
NetC6_2: "IC : Ti.37" C6.2 | length 7.3
  Top Layer w0.2: C6.2 37.808,46.571 38.87,47.633 38.87,51.698
NetC10_2: "IC : Ti.63" C10.2 | length 5.2
  Top Layer w0.2: 47.108,59.436 48.895,59.436 50.038,60.579
  Top Layer w0.254: 50.038,60.579 50.546,61.087 C10.2
NetC12_1: "IC : Ti.81" C12.1 | length 4.3
  Top Layer w0.2: 41.91,70.275 42.63,69.554 42.87,69.315 42.87,67.174
  Top Layer w0.254: 41.91,70.275 C12.1
NetC13_1: "IC : Ti.91" C13.1 | length 4
  Top Layer w0.2: 37.87,67.174 C13.1@37.87,70.979
  Top Layer w0.254: C13.1@37.87,70.979 C13.1
NetC18_1: C18.1 MotorIC1.1 | length 4
  Top Layer w0.254: MotorIC1.1 105.151,60.799 105.249,60.701 105.249,60.342 105.812,59.779 C18.1
NetC22_1: C22.1 MotorIC1.15 R4.2 R6.2 | length 14.8
  Top Layer w0.254: R6.2 R4.2 90.881,71.704 91.313,72.136 98.768,72.136 C22.1 98.895,69.27 MotorIC1.15
NetC23_1: C23.1 MotorIC1.27 | length 4.2
  Top Layer w0.254: C23.1 97.371,61.176 97.644,61.449 MotorIC1.27
NetC23_2: C23.2 MotorIC1.28 | length 2.1
  Top Layer w0.254: MotorIC1.28 98.916,58.729 C23.2
NetC24_1: C24.1 MotorIC2.1 | length 2.4
  Top Layer w0.254: C24.1 104.411,36.504 MotorIC2.1
NetC28_1: C28.1 MotorIC2.15 R7.2 R9.2 | length 12.9
  Top Layer w0.254: R9.2 R7.2 93.294,50.495 93.726,50.927 C28.1 98.641,47.376 98.543,47.278 MotorIC2.15
NetC29_1: C29.1 MotorIC2.27 | length 4.7
  Top Layer w0.254: C29.1 97.028,35.979 97.028,38.862 97.6,39.434 98.491,39.434 MotorIC2.27
NetC29_2: C29.2 MotorIC2.28 | length 2.9
  Top Layer w0.254: MotorIC2.28 98.59,38.773 C29.2
NetC31_1: C31.1 IC:OPA.8 R16.2 | length 7.1
  Top Layer w0.254: IC:OPA.8 R16.2@25.959,36.576 ; R16.2 R16.2@25.959,36.576 ; C31.1 26.059,36.676 R16.2@25.959,36.576
NetFB1_1: FB1.1 FB3.2 R10.1 R11.1 R12.1 R13.1 R14.1 R15.1 SPDT2.3 | length 140.8
  Top Layer w0.254: FB1.1 56.769,17.272 56.769,24.765 57.912,25.908 R10.1 59.69,25.705 59.69,16.764 61.341,15.113 70.612,15.113 ; R11.1 69.291,16.434 70.612,15.113 ; R12.1 78.359,25.73 78.359,15.262 78.21,15.113 ; R13.1 90.09,25.556 FB3.2 87.55,15.113 ; R14.1 102.184,17.221 100.076,15.113 ; R15.1 111.455,15.697 110.871,15.113 100.076,15.113 ; 70.612,15.113 78.21,15.113 ; 78.21,15.113 87.55,15.113 ; 87.55,15.113 100.076,15.113
  Bottom Layer w0.254: SPDT2.3 56.896,19.939 FB1.1
NetFB1_2: "IC : Ti.42" FB1.2 R10.2 | length 66.1
  Top Layer w0.254: 41.37,51.698 41.37,50.197 v1(42.164,49.403) ; R10.2 61.773,17.268 FB1.2
  Bottom Layer w0.254: v1(42.164,49.403) 42.164,19.304 47.244,14.224 61.595,14.224 61.896,14.525 FB1.2
NetFB2_1: "IC : Ti.48" FB2.1 R11.2 | length 59
  Top Layer w0.2: 44.37,51.698 44.37,50.499 v1(45.466,49.403)
  Top Layer w0.254: R11.2 71.374,25.705 FB2.1
  Bottom Layer w0.254: v1(45.466,49.403) 45.466,43.053 49.797,38.722 49.797,30.594 60.452,19.939 64.135,19.939 66.675,17.399 FB2.1
NetFB2_2: "IC : Ti.65" FB2.2 R12.2 | length 74.6
  Top Layer w0.2: 47.108,60.436 v1(48.498,60.436) v1@48.514,60.452
  Top Layer w0.254: FB2.2 76.374,25.625 R12.2
  Bottom Layer w0.254: v1(48.498,60.436) 48.498,41.819 51.308,39.009 51.308,31.496 52.987,29.817 67.846,29.817 74.295,23.368 74.295,17.294 74.444,17.145 76.12,17.145 FB2.2
NetFB4_1: "IC : Ti.69" FB4.1 R13.2 | length 105.9
  Top Layer w0.2: 47.108,62.436 48.689,62.436 v1(48.895,62.23)
  Top Layer w0.254: R13.2 91.872,25.463 92.253,25.082 92.443,25.082 98.899,18.627 98.899,17.687 FB4.1
  Bottom Layer w0.254: v1(48.895,62.23) 49.784,61.341 49.784,42.291 53.371,38.704 53.371,34.853 55.975,32.249 56.124,32.1 67.468,32.1 72.263,27.305 82.782,27.305 82.931,27.156 82.931,16.129 84.582,14.478 98.806,14.478 99.187,14.859 FB4.1
NetFB4_2: "IC : Ti.39" FB4.2 R14.2 | length 109.6
  Top Layer w0.2: v1(39.87,49.784) 39.87,51.698
  Top Layer w0.254: R14.2 104.187,25.404 FB4.2
  Bottom Layer w0.254: v1(39.87,49.784) 39.87,18.677 45.466,13.081 99.869,13.081 FB4.2
NetFB5_1: "IC : Ti.41" FB5.1 R15.2 | length 127.5
  Top Layer w0.2: v1(40.87,49.173) 40.87,51.698
  Top Layer w0.254: R15.2 113.411,25.324 FB5.1
  Bottom Layer w0.254: v1(40.87,49.173) 40.87,50.189 39.983,51.076 39.773,51.076 39.289,50.592 39.289,16.972 44.831,11.43 109.601,11.43 113.433,15.262 113.433,15.472 113.411,15.494 FB5.1
"NetIC : Ti_9": "IC : Ti.9" IC-buffer.11 PWM.5 | length 61.7
  Top Layer w0.2: v1(29.845,61.976) 30.385,61.436 31.632,61.436
  Top Layer w0.254: PWM.5 71.12,63.373 IC-buffer.11
  Bottom Layer w0.254: v1(29.845,61.976) 29.845,66.294 30.861,67.31 32.512,67.31 33.909,68.707 38.894,68.707 39.043,68.558 39.043,68.466 39.383,68.126 40.881,68.126 41.462,68.707 51.301,68.707 54.991,65.017 54.991,62.154 55.931,61.214 56.642,61.214 56.67,61.186 59.845,61.186 62.107,58.924 62.107,57.146 PWM.5
"NetIC : Ti_10": "IC : Ti.10" IC-buffer.13 PWM.6 | length 66.8
  Top Layer w0.254: v1(28.448,62.23) 29.742,60.936 31.632,60.936 ; PWM.6@63.634,53.347 PWM.6 63.5,53.594 65.913,56.007 65.913,57.172 69.32,60.579 72.132,60.579 ccw(c72.132,60.833) 72.311,60.653 IC-buffer.13
  Bottom Layer w0.254: v1(28.448,62.23) 29.718,60.96 30.204,60.96 30.426,61.182 30.426,64.506 32.935,67.014 50.758,67.014 50.822,67.078 51.032,67.078 54.483,63.627 54.483,61.944 55.749,60.678 59.337,60.678 61.468,58.547 61.468,53.848 62.103,53.213 PWM.6 PWM.6@63.262,53.451
"NetIC : Ti_12": "IC : Ti.12" JTAG.2 R19.2 | length 26.6
  Top Layer w0.2: v1@29.229,59.936 29.599,59.936 31.632,59.936
  Top Layer w0.254: JTAG.2@8.128,66.294 JTAG.2 11.43,66.421 12.141,65.71 R19.2 v8(18.364,65.71) ; v1(29.21,59.917) v1@29.229,59.936
  Bottom Layer w0.254: v8(18.364,65.71) 18.364,65.583 24.03,59.917 v1(29.21,59.917)
"NetIC : Ti_57": "IC : Ti.57" IC-buffer.17 PWM.8 | length 32.8
  Top Layer w0.2: 47.108,56.436 49.482,56.436 57.15,48.768 62.746,48.768 PWM.8@63.381,48.133
  Top Layer w0.254: PWM.8@63.381,48.133 PWM.8 65.405,50.038 65.405,51.181 69.977,55.753 IC-buffer.17 IC-buffer.17@72.388,55.856
"NetIC : Ti_58": "IC : Ti.58" IC-buffer.15 PWM.7 | length 32.1
  Top Layer w0.2: 47.108,56.936 50.379,56.936 56.642,50.673 PWM.7
  Top Layer w0.254: PWM.7 65.405,52.578 65.405,54.144 69.554,58.293 IC-buffer.15
"NetIC : Ti_67": "IC : Ti.67" JTAG.9 JTAG.11 | length 85.1
  Top Layer w0.2: 47.108,61.436 50.177,61.436 50.944,62.203
  Top Layer w0.254: JTAG.9 6.858,57.658 10.287,57.658 v1(10.414,57.531) ; v1(11.43,71.882) 11.557,71.882 12.827,73.152 22.418,73.152 v1(27.305,73.152) ; 50.944,62.203 51.662,62.203 52.959,63.5 52.959,64.008 54.429,65.478 54.429,74.222 v1(54.356,74.295)
  Bottom Layer w0.254: v1(10.414,57.531) 11.43,58.547 v1(11.43,71.882) ; v1(27.305,73.152) 48.835,73.152 48.908,73.079 49.39,73.079 50.679,74.368 54.283,74.368 v1(54.356,74.295)
  Bottom Layer w0.6: JTAG.11 JTAG.9
"NetIC : Ti_70": "IC : Ti.70" JTAG.7 | length 79.1
  Top Layer w0.2: 47.108,62.936 49.376,62.936 49.384,62.928 51.117,62.928 51.943,63.754
  Top Layer w0.254: JTAG.7 3.683,60.579 3.683,68.707 6.277,71.301 11.694,71.301 12.783,72.39 v1(29.21,72.39) ; 51.943,63.754 53.921,65.732 53.921,73.714 v1(53.848,73.787)
  Bottom Layer w0.254: v1(29.21,72.39) 29.464,72.644 39.496,72.644 39.569,72.571 49.6,72.571 49.673,72.644 50.098,72.644 51.314,73.86 53.775,73.86 v1(53.848,73.787)
"NetIC : Ti_71": "IC : Ti.71" JTAG.3 | length 69.9
  Top Layer w0.2: 47.108,63.436 49.594,63.436
  Top Layer w0.254: JTAG.3 4.318,65.024 4.318,68.199 6.912,70.793 11.905,70.793 12.867,71.755 v1(27.559,71.755) ; 49.594,63.436 49.72,63.436 50.927,64.643 53.413,67.129 53.413,73.206 v1(53.34,73.279)
  Bottom Layer w0.254: v1(27.559,71.755) 33.441,71.755 33.749,72.063 50.236,72.063 51.452,73.279 v1(53.34,73.279)
"NetIC : Ti_72": "IC : Ti.72" JTAG.1 | length 62.5
  Top Layer w0.2: 47.108,63.936 48.696,63.936 52.832,68.072
  Top Layer w0.254: JTAG.1 5.461,67.669 8.077,70.285 12.115,70.285 12.823,70.993 v1(28.702,70.993) ; 52.832,68.072 52.832,69.977 v1(52.832,72.517)
  Bottom Layer w0.254: v1(28.702,70.993) 33.397,70.993 33.959,71.555 50.492,71.555 51.454,72.517 v1(52.832,72.517)
"NetIC : Ti_77": "IC : Ti.77" USB.2 | length 110.4
  Top Layer w0.2: 44.87,67.174 44.87,69.127 45.212,69.469
  Top Layer w0.254: 45.212,69.469 45.426,69.683 46.398,69.683 49.73,73.015 49.73,74.222 v1(49.657,74.295)
  Bottom Layer w0.254: USB.2 10.628,17.232 9.398,16.002 7.896,16.002 7.704,16.194 7.704,20.643 8.191,21.13 8.191,41.846 12.065,45.72 12.065,73.406 12.954,74.295 v1(49.657,74.295)
"NetIC : Ti_78": "IC : Ti.78" USB.3 | length 102.9
  Top Layer w0.2: 44.37,67.174 44.37,68.373 ; 47.371,71.374 49.149,73.152 v1(49.149,73.66)
  Top Layer w0.254: 44.37,68.373 44.37,68.671 44.378,68.679 44.378,69.397 45.172,70.191 45.216,70.191 45.256,70.231 46.228,70.231 47.371,71.374
  Bottom Layer w0.254: USB.3 8.795,39.91 12.7,43.815 12.7,72.398 14.035,73.733 49.076,73.733 v1(49.149,73.66)
"NetIC : Ti_83": "IC : Ti.83" IC-buffer.8 PWM.4 | length 71.6
  Top Layer w0.2: 41.87,67.174 v1@41.87,69.262
  Top Layer w0.254: v1@41.87,69.262 41.91,69.302 v1(41.91,69.342) ; PWM.4 59.436,62.357 59.436,68.939 59.585,69.088 77.47,69.088 79.883,66.675 79.883,61.341 80.391,60.833 IC-buffer.8
  Bottom Layer w0.254: v1(41.91,69.342) 51.689,69.342 55.88,65.151 55.88,61.983 56.029,61.835 59.958,61.835 PWM.4
"NetIC : Ti_84": "IC : Ti.84" IC-buffer.6 PWM.3 | length 67.4
  Top Layer w0.2: v1(41.021,69.088) 41.37,68.739 41.37,67.174
  Top Layer w0.254: PWM.3 60.452,63.881 60.452,66.421 62.23,68.199 76.708,68.199 78.74,66.167 78.74,59.69 80.137,58.293 IC-buffer.6
  Bottom Layer w0.254: v1(41.021,69.088) 41.049,69.116 41.049,69.219 41.055,69.225 41.055,69.503 41.529,69.977 52.07,69.977 56.769,65.278 56.769,62.76 56.918,62.611 61.341,62.611 62.764,61.188 62.808,61.188 63.163,60.833 PWM.3
"NetIC : Ti_86": "IC : Ti.86" IC-buffer.4 PWM.2 | length 62.7
  Top Layer w0.2: 40.37,67.174 v1@40.37,69.707
  Top Layer w0.254: v1@40.37,69.707 v1(40.386,69.723) ; PWM.2 61.976,64.897 61.976,66.526 62.125,66.675 62.223,66.675 62.592,67.044 76.825,67.044 77.343,66.526 77.343,59.807 80.833,56.317 80.969,56.317 81.118,56.168 81.118,55.951 81.316,55.753 IC-buffer.4
  Bottom Layer w0.254: v1(40.386,69.723) 40.414,69.751 40.585,69.751 41.319,70.485 52.28,70.485 57.404,65.361 57.404,63.522 57.553,63.373 PWM.2
"NetIC : Ti_87": "IC : Ti.87" IC-buffer.2 PWM.1 | length 57.3
  Top Layer w0.2: v1(39.624,68.707) 39.87,68.461 39.87,67.174
  Top Layer w0.254: PWM.1 75.797,65.913 75.946,65.764 75.946,58.664 80.833,53.777 81.022,53.588 81.022,53.507 81.316,53.213 IC-buffer.2
  Bottom Layer w0.254: v1(39.624,68.707) 39.624,70.04 40.631,71.047 52.778,71.047 57.912,65.913 PWM.1
NetIC-buffer_3: IC-buffer.3 MotorIC2.25 | length 30.4
  Top Layer w0.254: IC-buffer.3 85.344,54.483 86.233,53.594 86.233,41.656 88.519,39.37 92.666,39.37 93.555,40.259 96.774,40.259 97.293,40.778 MotorIC2.25
NetIC-buffer_5: IC-buffer.5 MotorIC2.24 | length 31.9
  Top Layer w0.254: IC-buffer.5 85.153,57.023 87.122,55.054 87.122,42.037 89.154,40.005 92.583,40.005 93.345,40.767 96.393,40.767 97.054,41.428 MotorIC2.24
NetIC-buffer_7: IC-buffer.7 MotorIC2.23 | length 32.5
  Top Layer w0.254: IC-buffer.7 84.836,59.563 88.646,55.753 88.646,42.164 89.535,41.275 95.885,41.275 96.688,42.078 MotorIC2.23
NetIC-buffer_9: IC-buffer.9 MotorIC2.22 | length 33
  Top Layer w0.254: IC-buffer.9 84.201,62.103 89.611,56.693 89.611,43.104 90.551,42.164 95.631,42.164 96.195,42.728 MotorIC2.22
NetIC-buffer_12: IC-buffer.12 MotorIC1.22 | length 31.2
  Top Layer w0.254: v1(70.739,61.849) 71.025,61.849 71.279,62.103 IC-buffer.12 ; v1(93.345,64.262) 93.782,64.699 MotorIC1.22
  Bottom Layer w0.254: v1(70.739,61.849) 78.613,61.849 80.518,63.754 92.837,63.754 v1(93.345,64.262)
NetIC-buffer_14: IC-buffer.14 MotorIC1.23 | length 32.5
  Top Layer w0.254: v1(70.358,59.563) IC-buffer.14 ; v1(94.234,64.008) 94.274,64.008 94.315,64.049 MotorIC1.23
  Bottom Layer w0.254: v1(70.358,59.563) 79.375,59.563 80.645,60.833 91.059,60.833 v1(94.234,64.008)
NetIC-buffer_16: IC-buffer.16 MotorIC1.24 | length 33.6
  Top Layer w0.254: v1(70.231,57.023) IC-buffer.16 ; v1(94.488,63.246) 94.528,63.246 94.681,63.399 MotorIC1.24
  Bottom Layer w0.254: v1(70.231,57.023) 78.74,57.023 80.01,58.293 89.535,58.293 v1(94.488,63.246)
NetIC-buffer_18: IC-buffer.18 MotorIC1.25 | length 35.2
  Top Layer w0.254: v1(70.358,54.483) IC-buffer.18 ; v1(96.266,62.738) 96.277,62.749 MotorIC1.25
  Bottom Layer w0.254: v1(70.358,54.483) 79.883,54.483 81.153,53.213 86.741,53.213 v1(96.266,62.738)
NetIC:OPA_1: IC:OPA.1 IC:OPA.2 LED1.2 | length 9.8
  Top Layer w0.6: LED1.2 10.668,37.084 11.811,35.941 ; IC:OPA.2 16.465,35.941 IC:OPA.1
  Top Layer w0.7: 11.811,35.941 16.465,35.941
NetIC:OPA_6: IC:OPA.6 IC:OPA.7 LED2.2 | length 17.7
  Top Layer w0.254: 19.939,34.82 20.088,34.671
  Top Layer w0.6: LED2.2 15.621,40.132 ; IC:OPA.6 21.889,34.671 IC:OPA.7
  Top Layer w0.7: 15.621,40.132 19.939,35.814 19.939,34.82 ; 20.088,34.671 21.889,34.671
NetJTAG_13: JTAG.13 R2.2 | length 15.5
  Top Layer w0.254: JTAG.13 8.128,48.514 16.891,48.514 17.78,49.403 R2.2
NetJTAG_14: JTAG.14 R3.2 | length 4.1
  Top Layer w0.254: JTAG.14 11.989,51.181 R3.2
NetLED1_1: LED1.1 R17.1 | length 6.2
  Top Layer w0.254: R17.1 6.543,31.74 6.543,32.534 7.188,33.18 7.188,34.892 6.543,35.538 LED1.1
NetLED2_1: LED2.1 R18.1 | length 8.5
  Top Layer w0.254: R18.1 5.229,34.036 5.08,34.185 5.08,39.983 5.229,40.132 LED2.1
NetM1-VoA_1: M1-VoA.1 MotorIC1.4 MotorIC1.5 | length 32.8
  Top Layer w0.254: MotorIC1.4 104.792,63.119 ; 110.195,62.611 110.218,62.634 ; v2@111.402,62.634 v2(111.506,62.738)
  Top Layer w0.6: 104.792,63.119 109.093,63.119 109.601,62.611 110.195,62.611 ; 110.218,62.634 v2@111.402,62.634
  Bottom Layer w0.6: v2(111.506,62.738) 133.35,62.738 M1-VoA.1
NetM1-VoA_2: M1-VoA.2 MotorIC1.6 MotorIC1.7 | length 33.8
  Top Layer w0.6: 104.644,64.389 109.801,64.389 109.928,64.262 v2(109.982,64.262)
  Bottom Layer w0.6: v2(109.982,64.262) 129.874,64.262 M1-VoA.2
NetM1-VoB_1: M1-VoB.1 MotorIC1.8 MotorIC1.9 | length 39.1
  Top Layer w0.6: MotorIC1.8@104.864,65.532 v2(111.125,65.532)
  Bottom Layer w0.6: v2(111.125,65.532) 127,65.532 127.127,65.405 136.398,74.676 M1-VoB.1
NetM1-VoB_2: M1-VoB.2 MotorIC1.10 MotorIC1.11 | length 38.8
  Top Layer w0.254: v2@110.871,67.691 v2(110.871,67.818)
  Top Layer w0.6: 104.792,66.974 107.143,66.974 107.569,66.548 109.728,66.548 v2@110.871,67.691
  Bottom Layer w0.6: v2(110.871,67.818) 126.412,83.359 M1-VoB.2
NetM2-VoA_1: M2-VoA.1 MotorIC2.4 MotorIC2.5 | length 44.5
  Top Layer w0.6: 104.411,41.103 v2(107.016,41.103)
  Bottom Layer w0.6: v2(107.016,41.103) 126.619,21.5 126.619,16.002 127.254,15.367 M2-VoA.1
NetM2-VoA_2: M2-VoA.2 MotorIC2.6 MotorIC2.7 | length 39.7
  Top Layer w0.6: 104.411,42.418 v2(108.077,42.418)
  Bottom Layer w0.6: v2(108.077,42.418) 130.128,20.367 M2-VoA.2
NetM2-VoB_1: M2-VoB.1 MotorIC2.8 MotorIC2.9 | length 36
  Top Layer w0.6: 104.411,43.688 109.093,43.688 v2(109.728,43.053)
  Bottom Layer w0.6: v2(109.728,43.053) 121.031,31.75 M2-VoB.1
NetM2-VoB_2: M2-VoB.2 MotorIC2.10 MotorIC2.11 | length 34.9
  Top Layer w0.254: 104.411,44.958 MotorIC2.11 ; 109.601,44.958 109.855,44.704 v2(109.982,44.704)
  Top Layer w0.6: 104.411,44.958 109.601,44.958
  Bottom Layer w0.6: v2(109.982,44.704) 117.936,36.75 M2-VoB.2
NetMotorIC1_16: MotorIC1.16 R4.1 | length 7.1
  Top Layer w0.254: R4.1 95.123,70.739 97.282,68.58 98.897,68.58 MotorIC1.16
NetMotorIC1_17: MotorIC1.17 MotorIC1.18 R5.2 R6.1 | length 6.8
  Top Layer w0.254: R6.1 92.812,67.996 R5.2 94.916,67.949 MotorIC1.17 MotorIC1.18
NetMotorIC2_16: MotorIC2.16 R7.1 | length 5.5
  Top Layer w0.254: R7.1 95.301,48.895 96.752,48.895 96.901,48.746 96.901,46.758 97.05,46.609 98.516,46.609 MotorIC2.16
NetMotorIC2_17: MotorIC2.17 MotorIC2.18 R8.2 R9.1 | length 7.9
  Top Layer w0.254: R8.2 93.345,44.12 93.345,45.339 93.726,45.72 95.025,45.72 ; R9.1 95.174,45.869 95.025,45.72 ; 98.535,45.653 95.092,45.653 95.025,45.72
NetSPDT_3: SPDT.3 USB.1 | length 25.1
  Bottom Layer w0.254: USB.1 14.605,14.732 15.494,15.621 15.494,20.955 17.145,22.606 22.987,22.606 23.495,23.114 SPDT.3
VCC: C18.2 C19.1 C20.1 C21.1 C24.2 C25.1 C26.1 C27.1 m-Vi.1 MotorIC1.2 MotorIC1.13 MotorIC2.2 MotorIC2.13 | length 111.2
  Top Layer w0.254: MotorIC2.2 104.455,39.434 105.306,39.434 105.956,38.784 C24.2 110.236,36.449 110.258,36.427 110.468,36.427 111.252,37.211 111.252,47.349 111.103,47.498 108.623,47.498 C25.1 106.845,47.663 105.81,46.628 MotorIC2.13 ; MotorIC1.2 108.134,61.449 C18.2 108.242,61.341 111.887,61.341 112.649,62.103 112.649,68.834 111.976,69.507 C20.1 108.42,69.342 106.553,69.342 105.81,68.599 MotorIC1.13 ; C26.1 106.083,51.152 106.466,51.535 106.691,51.535 ; C27.1 C27.1@122.682,53.487
  Top Layer w1: C26.1 107.823,50.927 108.458,50.292 C25.1 ; C19.1 108.077,72.009 108.585,71.501 C20.1 ; 106.691,51.535 108.516,53.36 C27.1 ; 111.887,61.341 113.558,59.67 C21.1 122.682,56.578 ; C27.1@122.682,53.487 122.682,56.578 ; m-Vi.1 130.937,50.673 125.031,56.578 122.682,56.578
pads on no net: "IC : Ti.1" "IC : Ti.2" "IC : Ti.6" "IC : Ti.7" "IC : Ti.8" "IC : Ti.16" "IC : Ti.17" "IC : Ti.18" "IC : Ti.19" "IC : Ti.20" "IC : Ti.21" "IC : Ti.22" "IC : Ti.23" "IC : Ti.28" "IC : Ti.29" "IC : Ti.30" "IC : Ti.31" "IC : Ti.32" "IC : Ti.33" "IC : Ti.34" "IC : Ti.35" "IC : Ti.40" "IC : Ti.43" "IC : Ti.44" "IC : Ti.45" "IC : Ti.49" "IC : Ti.50" "IC : Ti.51" "IC : Ti.52" "IC : Ti.53" "IC : Ti.54" "IC : Ti.55" "IC : Ti.56" "IC : Ti.59" "IC : Ti.64" "IC : Ti.66" "IC : Ti.68" "IC : Ti.73" "IC : Ti.74" "IC : Ti.75" "IC : Ti.76" "IC : Ti.82" "IC : Ti.85" "IC : Ti.88" "IC : Ti.89" "IC : Ti.94" "IC : Ti.95" "IC : Ti.96" "IC : Ti.97" "IC : Ti.98" "IC : Ti.99" "IC : Ti.100" SPDT2.1 SPDT.1
copper on no net:
  other v4: 5.842,5.334 139.319,6.096 4.318,90.043 138.557,90.551

## Silkscreen, mask and mechanical layers (free items; w line width, h text height)
Bottom Solder:
  the board outline again, w0.254
Mechanical 1:
  lines w0.254: -1.016,-0.254 -1.016,94.742 ; 1.293,-4.304 1.293,-3.796 ; 2.816,-3.539 1.293,-4.05 ; 2.818,-4.555 1.293,-4.05 ; 64.516,-3.937 1.293,-4.05 ; 80.31,-3.909 143.533,-3.796 ; 142.008,-3.291 143.533,-3.796 ; 142.01,-4.307 143.533,-3.796 ; 142.367,-0.381 142.494,94.615 ; 143.533,-4.05 143.533,-3.542
  text "142.24 (mm)" at 64.772,-4.851 h1.52 r0.1

## Text inside footprints (layer, text, board x,y; h text height)
JTAG: Top Overlay "2" at 7.493,69.469 h1.27 r270; Top Overlay "1" at 4.953,69.469 h1.27 r270; Top Overlay "14" at 7.493,49.149 h1.27 r270; Top Overlay "13" at 4.953,49.149 h1.27 r270